# Altium PCB V_1.PcbDoc
Units mm, origin at the board's own origin, x right, y up, seen from the top; angles counter-clockwise.
Board outline 152.4 x 101.6 mm, 2 copper layers (Top Layer, Bottom Layer); 6 components, 10 nets, 82 pads, 3 vias.
Unrouted connection lines stored in the file: 2.
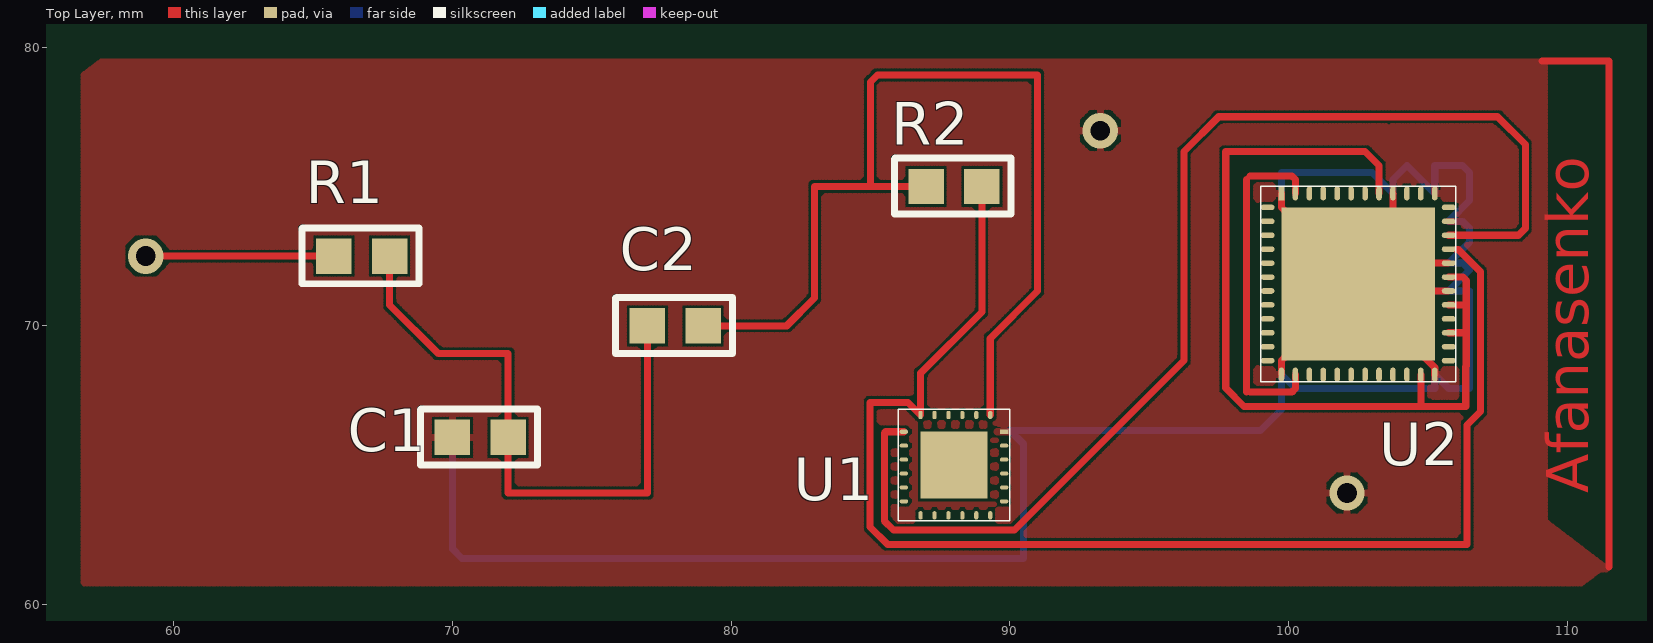
[diagram p0: Top Layer view]
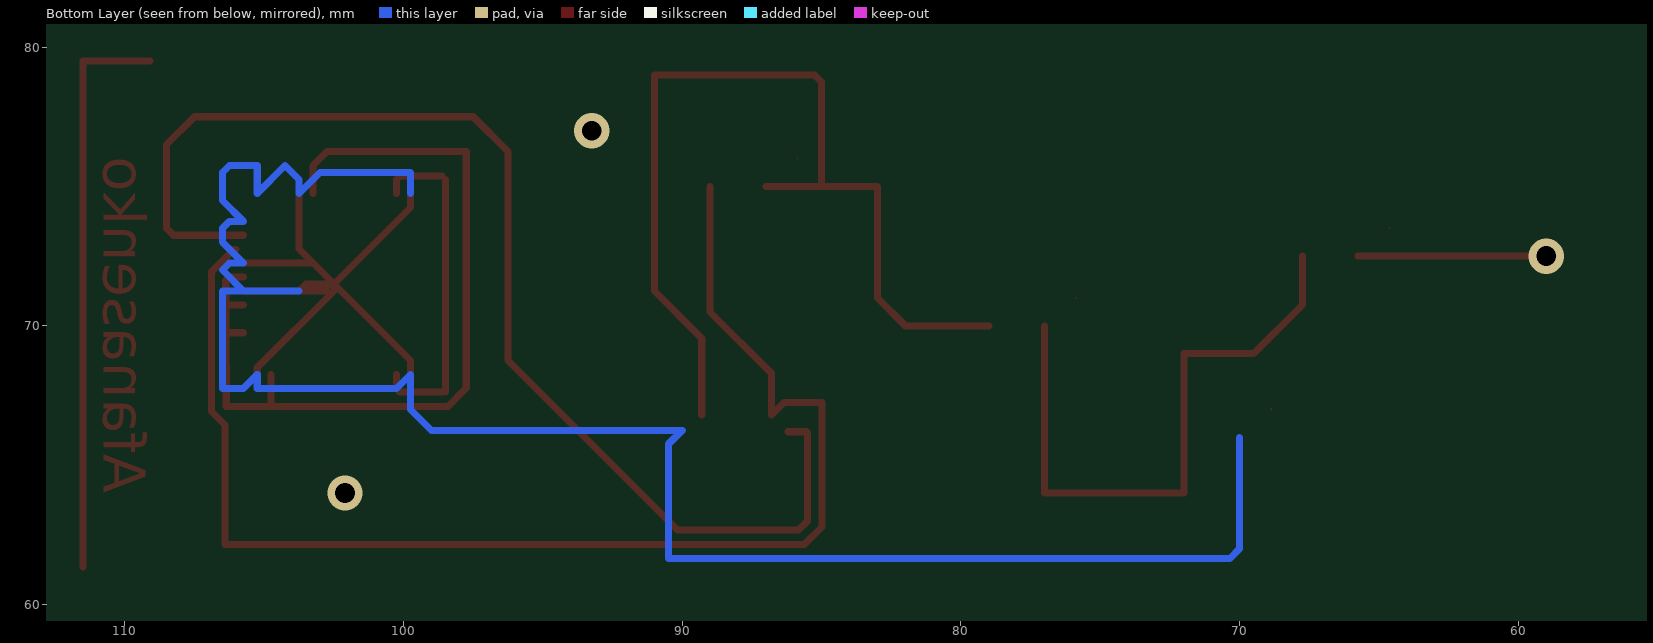
[diagram p1: Bottom Layer view, seen from below]

## Layer stack, top to bottom
Top Layer: signal copper 0.0356
Dielectric: dielectric 0.32, FR-4, Dk 4.8
Bottom Layer: signal copper 0.0356

## Board outline
25.4,25.4 177.8,25.4 177.8,127 25.4,127

## Design rules (kind name [scope] priority, off if disabled: settings)
Clearance [All] p1: gap=0.1
PolygonConnect [All] p1: connectstyle=Relief reliefconductorwidth=0.254 reliefentries=4 polygonreliefangle="90 Angle"
RoutingVias [All] p1: holewidth=0.711 width=1.27 viastyle="Through Hole" minholewidth=0.711 minwidth=1.27 maxholewidth=0.711 maxwidth=1.27
SilkscreenOverComponentPads [All] p1: minsilkscreentomaskgap=0.254
SolderMaskExpansion [All] p1: expansion=0.102
Width [All] p1: maxlimit=0.254 minlimit=0.254 preferedwidth=0.254
27 further rules are at their usual default settings.

## Components (designator, comment, footprint, x,y, rotation, side; value= is the part's Value field where it differs from the comment)
C1 "2.2p" C_0805 70,66 r0 top
C2 "2.2p" C_0805 77,70 r0 top
R1 "6.8k" R_0805 65.75,72.5 r0 top
R2 "2.2k" R_0805 87,75 r0 top
U1 "ADA4932-2" ADA4932-2 86,63 r0 top
U2 "ADS61B49" ADS61B49 99,68 r0 top

## Footprints (in the part's own frame and the unit in brackets; to place one, negate y for a bottom-side part, rotate by r counter-clockwise, add the part's x,y. Pads: shape width x height; smd on the part's side, far side on the other; paste and mask are expansions set on the pad)
ADA4932-2 [mm]
  rect 0.3x0.15 smd: 1(3.8,3.2)
  oval 0.3x0.15 smd: 2(3.8,2.7) 3(3.8,2.2) 4(3.8,1.7) 5(3.8,1.2) 6(3.8,0.7) 13(0.2,0.7) 14(0.2,1.2) 15(0.2,1.7) 16(0.2,2.2) 17(0.2,2.7) 18(0.2,3.2)
  oval 0.15x0.3 smd: 7(3.3,0.2) 8(2.8,0.2) 9(2.3,0.2) 10(1.8,0.2) 11(1.3,0.2) 12(0.8,0.2) 19(0.8,3.8) 20(1.3,3.8) 21(1.8,3.8) 22(2.3,3.8) 23(2.8,3.8) 24(3.3,3.8)
  rect 2.4x2.4 smd: 25(2,2)
  silkscreen extent 0,0 4,4
ADS61B49 [mm]
  rect 0.2x0.5 smd: 1(0.75,6.75)
  oval 0.2x0.5 smd: 2(1.25,6.75) 3(1.75,6.75) 4(2.25,6.75) 5(2.75,6.75) 6(3.25,6.75) 7(3.75,6.75) 8(4.25,6.75) 9(4.75,6.75) 10(5.25,6.75) 11(5.75,6.75) 12(6.25,6.75) 25(6.25,0.25) 26(5.75,0.25) 27(5.25,0.25) 28(4.75,0.25) 29(4.25,0.25) 30(3.75,0.25) 31(3.25,0.25) 32(2.75,0.25) 33(2.25,0.25) 34(1.75,0.25) 35(1.25,0.25) 36(0.75,0.25)
  oval 0.5x0.2 smd: 13(6.75,6.25) 14(6.75,5.75) 15(6.75,5.25) 16(6.75,4.75) 17(6.75,4.25) 18(6.75,3.75) 19(6.75,3.25) 20(6.75,2.75) 21(6.75,2.25) 22(6.75,1.75) 23(6.75,1.25) 24(6.75,0.75) 37(0.25,0.75) 38(0.25,1.25) 39(0.25,1.75) 40(0.25,2.25) 41(0.25,2.75) 42(0.25,3.25) 43(0.25,3.75) 44(0.25,4.25) 45(0.25,4.75) 46(0.25,5.25) 47(0.25,5.75) 48(0.25,6.25)
  rect 5.5x5.5 smd: 49(3.5,3.5)
  silkscreen extent 0,0 7,7
C_0805 [mm]
  rect 1.27x1.27 smd: 1(0,0) 2(2,0)
  Top Layer lines w0.05: -1.143,0.991 -1.118,1.016
  silkscreen extent -1.14,-0.99 3.05,1.02
R_0805 [mm]
  rect 1.27x1.27 smd: 1(0,0) 2(2,0)
  Top Layer lines w0.05: -1.143,0.991 -1.118,1.016
  silkscreen extent -1.14,-0.99 3.05,1.02

## Part data
C1 C2: library part C
R1 R2: library part R

## Via types
v1: diameter 1.27, hole 0.711, Top Layer to Bottom Layer, 3 vias

## Nets (pads, with @x,y where several pads share a name; then routed paths per layer and width w, separated by ;. In a path a pad name is that pad's centre, name@x,y a point inside that pad or via, vN(x,y) a via of type N, cw(c..) or ccw(c..) an arc to the next point about the centre after c; other vN are vias at no path point)
"1.8 V": U2.2 U2.35 | length 12
  Top Layer w0.254: 98.5,67.619 98.5,75.25 ; 98.619,67.619 100.119,67.619 100.25,67.75 U2.35 ; 98.619,75.369 98.631,75.381 100.119,75.381 100.25,75.25 U2.2
"3.3 V": U2.8 U2.18 U2.20 U2.22 U2.26 | length 31.7
  Top Layer w0.254: U2.8 103.25,75.75 102.75,76.25 97.75,76.25 97.75,67.77 98.409,67.111 104.75,67.111 ; U2.26 104.75,67.111 ; U2.22 106.381,69.75 ; U2.20 106.381,70.75 ; U2.18 106.262,71.75 106.381,71.631 106.381,70.75 ; 104.75,67.111 106.361,67.111 106.361,68.531 106.381,68.551 106.381,69.75 ; 106.381,69.75 106.381,70.75
"+ 5V": U1.3
"-5 V": U1.22
GND: C1.1 U1.1 U2.1 U2.9 U2.12 U2.14 U2.17 U2.19 U2.25 U2.36 U2.49 | length 119.1
  Top Layer w0.254: U2.36 99.75,68.75 U2.49 ; U2.1 99.75,74.25 U2.49 ; U2.49@102.75,71.25 U2.49@103.5,71.25 ; U2.9 103.75,72.75 U2.49 ; U2.25 105.25,68.5 102.5,71.25 U2.49 ; U2.19 U2.49@103.75,71.25 ; U2.17 103.25,72.25 U2.49 ; 109.1,79.5 111.5,79.5 111.5,61.35 ; U2.49 U2.49@103.5,71.5 ; U2.49 U2.49@103.5,71.25 ; U2.49 U2.49@103.75,71.25 ; U2.49@103.5,71.25 U2.49@103.75,71.25 ; U2.49@103.5,71.25 U2.49@103.5,71.5 ; U2.49@103.5,71.5 U2.49@103.75,71.25
  Bottom Layer w0.254: 70,66 70,62 70.347,61.653 90.5,61.653 90.5,65.75 90,66.25 99,66.25 99.75,67 99.75,68.25 100.25,67.75 105.25,67.75 105.25,68.25 105.75,67.75 106.5,67.75 106.5,71.25 105.75,71.25 ; 99.75,74.75 99.75,75.5 103,75.5 103.75,74.75 103.75,75.25 104.25,75.75 105.25,74.75 105.25,75.75 106.25,75.75 106.5,75.5 106.5,74.5 105.75,73.75 106.25,73.75 106.5,73.5 106.5,73 105.75,72.25 106.25,72.25 106.5,72 105.75,71.25 ; 103.75,71.25 105.75,71.25
  other v1: 102.1,64 93.25,77
NetC1_2: C1.2 C2.1 R1.2 | length 22.7
  Top Layer w0.254: R1.2 67.75,70.75 69.5,69 72,69 C1.2 72,64 77,64 C2.1
NetC2_2: C2.2 R2.1 U1.24 | length 35.2
  Top Layer w0.254: C2.2 82,70 83,71 83,75 85,75 ; R2.1 85,75 ; U1.24 89.3,69.55 91,71.25 91,79 85.25,79 85,78.75 85,75
NetR1_1: R1.1 | length 6.7
  Top Layer w0.254: v1(59,72.5) R1.1
NetR2_2: R2.2 U1.19 U2.16 | length 48.4
  Top Layer w0.254: R2.2 89,70.5 86.8,68.3 U1.19 86.35,67.25 85,67.25 84.992,67.242 84.992,62.782 85.613,62.161 106.411,62.161 106.411,66.443 106.889,66.921 106.889,71.941 106.099,72.731 106.011,72.731
NetU1_18: U1.18 U2.15 | length 43.8
  Top Layer w0.254: U1.18 85.55,66.2 85.5,66.15 85.5,63 85.831,62.669 90.169,62.669 96.25,68.75 96.25,76.25 97.5,77.5 107.5,77.5 108.5,76.5 108.5,73.5 108.25,73.25 U2.15
pads on no net: U1.2 U1.4 U1.5 U1.6 U1.7 U1.8 U1.9 U1.10 U1.11 U1.12 U1.13 U1.14 U1.15 U1.16 U1.17 U1.20 U1.21 U1.23 U1.25 U2.3 U2.4 U2.5 U2.6 U2.7 U2.10 U2.11 U2.13 U2.21 U2.23 U2.24 U2.27 U2.28 U2.29 U2.30 U2.31 U2.32 U2.33 U2.34 U2.37 U2.38 U2.39 U2.40 U2.41 U2.42 U2.43 U2.44 U2.45 U2.46 U2.47 U2.48

## Polygon pours and split planes (outlines as drawn)
GND on Top Layer "GND" (hatched 90Degree grid 0.1 track 0.2, remove dead copper, pour order 2): 111.5,61.25 109.205,63 109.205,79.5 57.406,79.5 56.75,79 56.75,60.75 110.516,60.75 111.172,61.25

## Other copper
Top Layer:
  text "Afanasenko" at 110.75,64 h1.5 r90

## Silkscreen, mask and mechanical layers (free items; w line width, h text height)
Top Solder:
  lines w0.25: 55,60 55,80.25 112.5,80.25 112.5,60 55,60